# EAGLE board microSRCP-RaspiV3 (EAGLE 6.5.0)
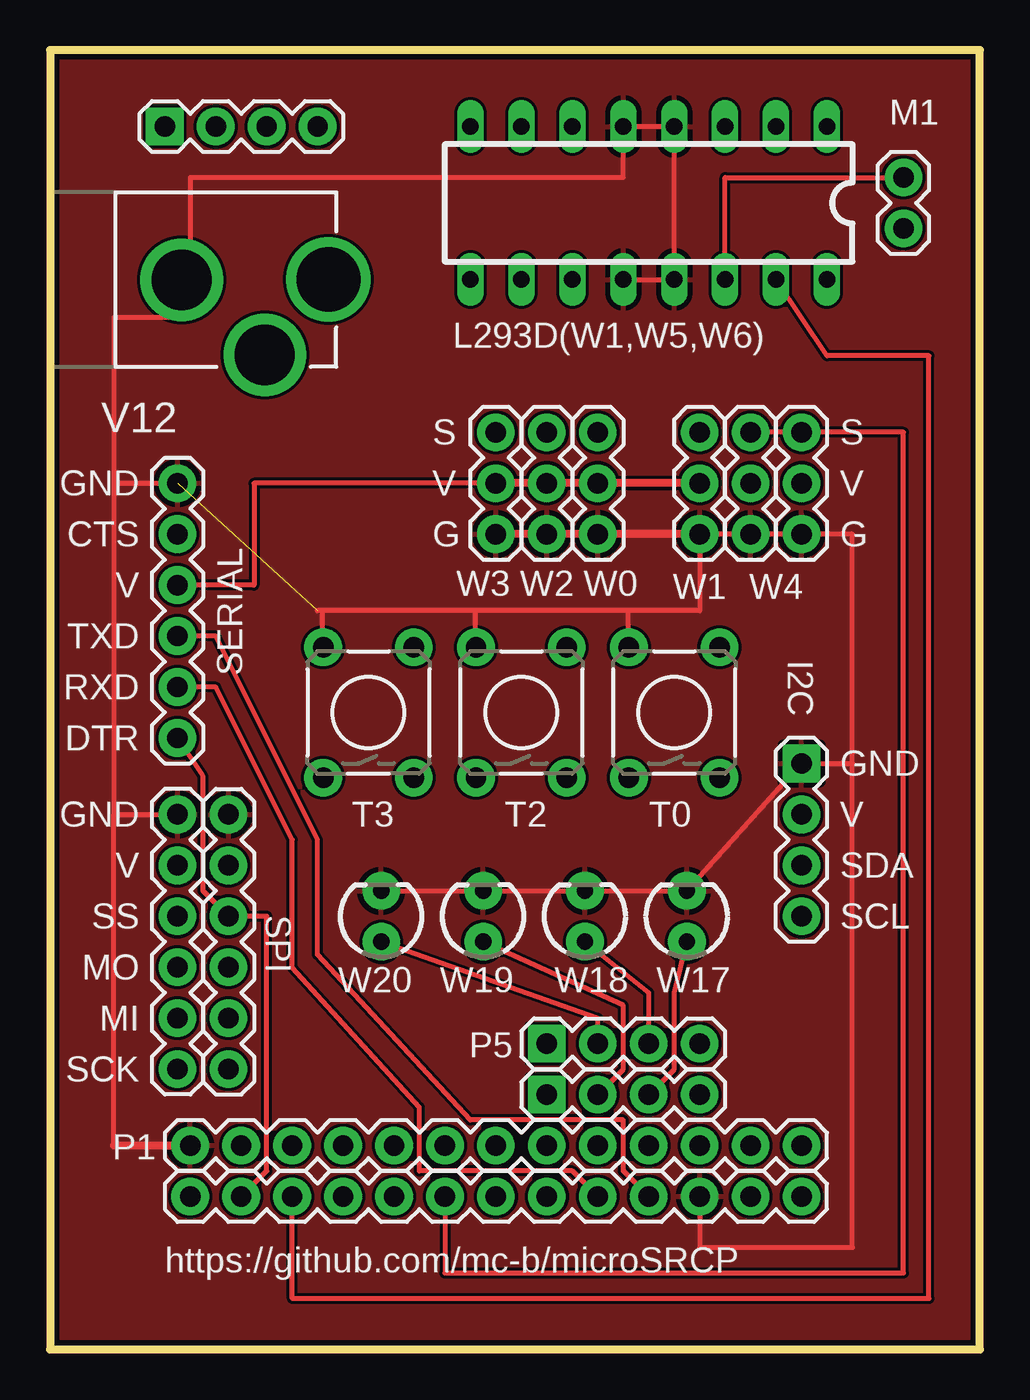
[diagram p0: board, top side]
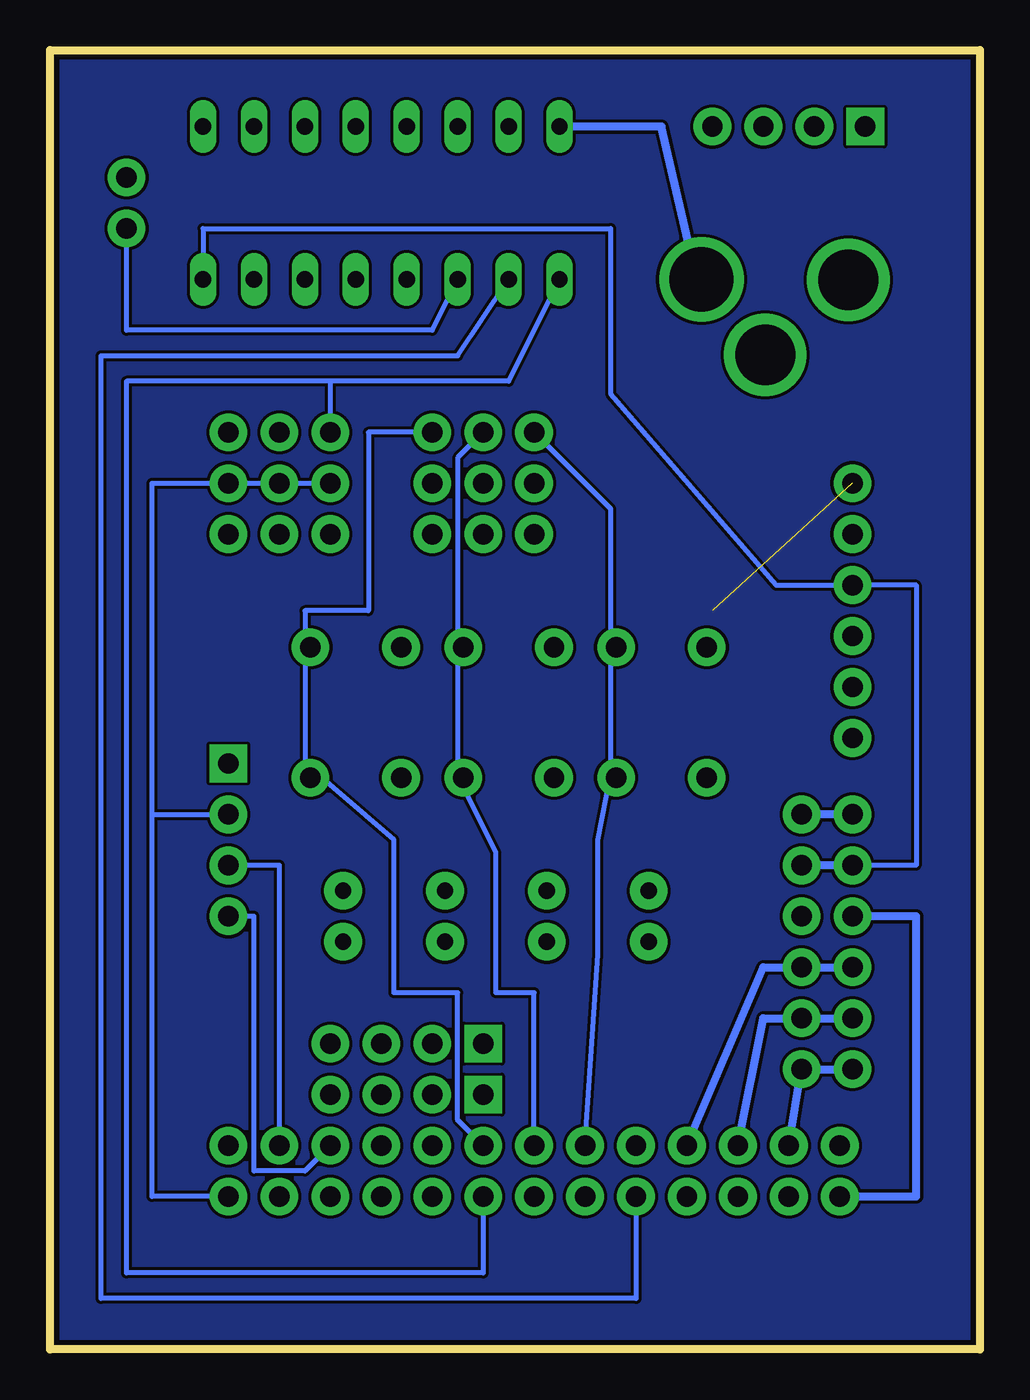
[diagram p1: board, bottom side, seen from below]

Size 46.35 x 64.77 mm. Coordinates in mm from the lower left corner, seen from the top.
Outline: 0,0 46.35,0 46.35,64.77 0,64.77 0,0
Copper layers (1*16): Top 0.035mm / dielectric 1.5mm / Bottom 0.035mm
Design rules "Elecrow_2-layer_eagle_rule": minimum track width 6mil, minimum drill 12mil, track to track 6mil, track to pad 6mil, pad to pad 6mil, via to via 6mil, smd to smd 0mil, copper to edge 10mil, drill to drill 10mil, minimum pad ring 10mil, minimum via ring 6mil, stop-mask expansion 2mil, vias tented up to drill 100mil, thermal gap 10mil

## Footprints (pad centres in the part's own frame; a part is rotated, then mirrored left to right if it is on the bottom)
1X13 = drill 1.016 pad 1.88: 1 0,0; 2 2.54,0; 3 5.08,0; 4 7.62,0; 5 10.16,0; 6 12.7,0; 7 15.24,0; 8 17.78,0; 9 20.32,0; 10 22.86,0; 11 25.4,0; 12 27.94,0; 13 30.48,0
1X04 = drill 1.016 pad 1.88 square: 1 0,0 | drill 1.016 pad 1.88: 2 2.54,0; 3 5.08,0; 4 7.62,0
1X06 = drill 1.016 pad 1.88: 1 0,0; 2 2.54,0; 3 5.08,0; 4 7.62,0; 5 10.16,0; 6 12.7,0
DIL16 = drill 0.813 long: 1 -8.89,-3.81; 2 -6.35,-3.81; 3 -3.81,-3.81; 4 -1.27,-3.81; 5 1.27,-3.81; 6 3.81,-3.81; 7 6.35,-3.81; 8 8.89,-3.81; 9 8.89,3.81; 10 6.35,3.81; 11 3.81,3.81; 12 1.27,3.81; 13 -1.27,3.81; 14 -3.81,3.81; 15 -6.35,3.81; 16 -8.89,3.81
1X02 = drill 1.016 pad 1.88: 1 0,0; 2 2.54,0
TACTILE-PTH = drill 1.016 pad 1.88: 1 -3.251,2.261; 2 3.251,2.261; 3 -3.251,-2.261; 4 3.251,-2.261
POWER_JACK_PTH_LOCK = drill 2.997 pad 4.115: GND 0.025,6.557; GNDBREAK 3.762,10.7 | drill 3.2 pad 4.115: PWR 0,13.878
1X03 = drill 1.016 pad 1.88: 1 0,0; 2 2.54,0; 3 5.08,0
LED3MM = drill 0.813 pad 1.88: A -1.27,0; K 1.27,0

## Placement (x,y rotation side)
E$1  [1X13]  6.98,7.62 0 top
E$2  [1X04]  5.72,60.96 0 top
E$3  [1X04]  24.77,12.7 0 top
E$5  [1X06]  8.89,13.97 90 top
I2C  [1X04]  37.46,29.21 270 top
L293D(W1,W5,W6)  [DIL16]  29.84,57.15 180 top
M1  [1X02]  42.55,58.42 270 top
P1  [1X13]  6.98,10.16 0 top
P5  [1X04]  24.77,15.24 0 top
SERIAL  [1X06]  6.35,30.48 90 top
SPI  [1X06]  6.35,26.67 270 top
T0  [TACTILE-PTH]  31.12,31.75 90 top
T2  [TACTILE-PTH]  23.5,31.75 90 top
T3  [TACTILE-PTH]  15.88,31.75 90 top
V12  [POWER_JACK_PTH_LOCK]  0,53.34 270 top
W0  [1X03]  27.3,40.64 90 top
W1  [1X03]  34.93,40.64 90 top
W1N  [1X03]  37.46,40.64 90 top
W2  [1X03]  24.77,40.64 90 top
W3  [1X03]  22.23,40.64 90 top
W4  [1X03]  32.38,40.64 90 top
W17  [LED3MM]  31.75,21.59 90 top
W18  [LED3MM]  26.67,21.59 90 top
W19  [LED3MM]  21.59,21.59 90 top
W20  [LED3MM]  16.51,21.59 90 top

## Library data of the parts
E$1-E$3 I2C P1 P5 V12 = SparkFun-Connectors
E$5 SERIAL SPI = SparkFun-Boards
L293D(W1,W5,W6) = SparkFun-DigitalIC
M1 W0 W1-W4 = SparkFun-Capacitors
T0 T2 T3 = SparkFun-Electromechanical
W1N = SparkFun-Sensors
W17-W20 = SparkFun-LED

## Nets
5V: E$1.13 E$5.5 I2C.2 L293D(W1,W5,W6).16 SERIAL.4 SPI.2 W0.2 W1.2 W1N.2 W2.2 W3.2 W4.2
GND: E$1.11 E$5.6 I2C.1 L293D(W1,W5,W6).4 L293D(W1,W5,W6).5 L293D(W1,W5,W6).12 L293D(W1,W5,W6).13 P1.1 SERIAL.6 SPI.1 W0.1 W1.1 W1N.1 W2.1 W3.1 W4.1 W17.K W18.K W19.K W20.K
S0: P1.8 W0.3
S1: E$1.8 L293D(W1,W5,W6).9 W4.3
S2: P1.7 W2.3
S3: P1.6 W3.3
S4: E$1.6 W1.3 W1N.3
S5: E$1.5 L293D(W1,W5,W6).10
S6: E$1.3 L293D(W1,W5,W6).15
S$2: E$5.1 P1.2 SPI.6
S$3: E$5.2 P1.3 SPI.5
S$4: E$5.3 P1.4 SPI.4
S$5: E$1.1 SPI.3
S$6: E$1.2 E$5.4 SERIAL.1
S$8: E$3.3 W17.A
S$10: P5.3 W18.A
S$11: E$3.2 W19.A
S$12: P5.2 W20.A
S$13: E$1.9 SERIAL.2
S$14: E$1.10 SERIAL.3
S$22: L293D(W1,W5,W6).8
SM1L: L293D(W1,W5,W6).14 M1.1
SM1R: L293D(W1,W5,W6).11 M1.2
SSCL: I2C.4 P1.11
SSDA: I2C.3 P1.12

## Tracks (layer width: path | path; a pad name or v marks a point on that pad's centre or on a via)
5V
  Top 0.254: SERIAL.4 10.16,38.1 10.16,43.18 22.86,43.18
  Top 0.406: W3.2 22.86,43.18 W2.2 W0.2 W4.2
  Bottom 0.254: SPI.2 3.18,24.13 3.18,38.1 SERIAL.4 10.16,38.1 18.41,47.62 18.41,55.88 38.74,55.88 L293D(W1,W5,W6).16 | W4.2 W1.2 W1N.2 41.27,43.18 41.27,26.67 | 41.27,26.67 I2C.2 | 41.27,26.67 41.27,7.62 E$1.13
  Bottom 0.406: SPI.2 E$5.5
GND  (1 unrouted)
  Top 0.254: E$1.11 32.38,5.08 40.01,5.08 40.01,29.21 | 40.01,29.21 40.01,40.64 W1N.1 W1.1 W4.1 32.38,36.83 28.83,36.83 | 28.83,36.83 21.21,36.83 | 21.21,36.83 13.59,36.83 | 13.59,36.83 13.34,36.83 | 40.01,29.21 I2C.1 W17.K W18.K W19.K W20.K | 3.18,26.67 SPI.1 | 3.18,10.16 3.18,26.67 | 3.18,43.18 3.18,51.44 6.98,51.44 6.98,58.42 28.58,58.42 L293D(W1,W5,W6).5 L293D(W1,W5,W6).4 L293D(W1,W5,W6).13 L293D(W1,W5,W6).12 | 3.18,43.18 3.18,26.67 | 3.18,43.18 SERIAL.6 | 28.83,35.05 28.83,36.83 | 21.21,35.05 21.21,36.83 | 13.59,35.05 13.59,36.83
  Top 0.406: W4.1 W0.1 W2.1 W3.1 | 3.18,10.16 P1.1
  Bottom 0.406: SPI.1 E$5.6
  pour Top: 0,0 46.35,0 46.35,64.77 0,64.77
S0
  Bottom 0.254: P1.8 26.04,11.43 26.04,17.78 29.21,17.78 29.21,25.4 33.66,29.21 33.66,34.93 33.66,35.56 33.66,36.83 30.48,36.83 30.48,45.72 W0.3
S1
  Bottom 0.254: E$1.8 24.77,3.81 42.55,3.81 42.55,48.26 32.38,48.26 | L293D(W1,W5,W6).9 23.5,48.26 32.38,48.26 | 32.38,48.26 W4.3
S2
  Bottom 0.254: W2.3 26.04,44.45 26.04,28.57 24.13,24.77 24.13,17.78 22.23,17.78 P1.7
S3
  Bottom 0.254: P1.6 19.05,19.69 19.05,25.4 18.41,28.57 18.41,41.91 W3.3
S4
  Top 0.254: E$1.6 19.69,3.81 42.55,3.81 42.55,45.72 W1N.3 W1.3
S5
  Bottom 0.254: E$1.5 17.15,2.54 43.82,2.54 43.82,49.53 26.04,49.53 L293D(W1,W5,W6).10
S6
  Top 0.254: L293D(W1,W5,W6).15 38.74,49.53 43.82,49.53 43.82,2.54 12.07,2.54 E$1.3
S$1
  pour Bottom: 0,64.77 0,0 46.35,0 46.35,64.77
S$2
  Bottom 0.406: P1.2 E$5.1 SPI.6
S$3
  Bottom 0.406: P1.3 10.8,16.51 E$5.2 SPI.5
S$4
  Bottom 0.406: P1.4 10.8,19.05 E$5.3 SPI.4
S$5
  Bottom 0.406: E$1.1 3.18,7.62 3.18,21.59 SPI.3
S$6
  Top 0.254: E$1.2 10.8,8.89 10.8,21.59 E$5.4 7.62,22.86 7.62,28.57 SERIAL.1
S$8
  Top 0.254: E$3.3 31.12,13.97 31.12,17.78 W17.A
S$10
  Top 0.254: P5.3 29.84,17.78 W18.A
S$11
  Top 0.254: E$3.2 28.58,13.97 28.58,17.14 W19.A
S$12
  Top 0.254: P5.2 27.3,16.51 W20.A
S$13
  Top 0.254: E$1.9 26.04,8.89 18.41,8.89 18.41,12.07 12.07,19.05 12.07,25.4 8.26,33.02 SERIAL.2
S$14
  Top 0.254: SERIAL.3 8.26,35.56 13.34,25.4 13.34,19.69 20.96,11.43 28.58,11.43 28.58,8.89 E$1.10
S$22
  Bottom 0.406: 13.97,52.7 15.88,60.96 L293D(W1,W5,W6).8
SM1L
  Top 0.254: L293D(W1,W5,W6).14 33.66,58.42 M1.1
SM1R
  Bottom 0.254: L293D(W1,W5,W6).11 27.3,50.8 42.55,50.8 M1.2
SSCL
  Bottom 0.254: P1.11 33.66,8.89 36.2,8.89 36.2,21.59 I2C.4
SSDA
  Bottom 0.254: P1.12 34.93,24.13 I2C.3

## Text on the board
tNames: S / V / G | S / V / G | GND / CTS / V / TXD / RXD / DTR | GND / V / SDA / SCL | GND / V / SS / MO / MI / SCK | https://github.com/mc-b/microSRCP